# Altium PCB NRF51822_Test.PcbDoc
Units mil, origin at the board's own origin, x right, y up, seen from the top; angles counter-clockwise.
Board outline 900 x 1500 mil, 2 copper layers (Top Layer, Bottom Layer); 27 components, 43 nets, 129 pads, 8 vias.
Unrouted connection lines stored in the file: 7.
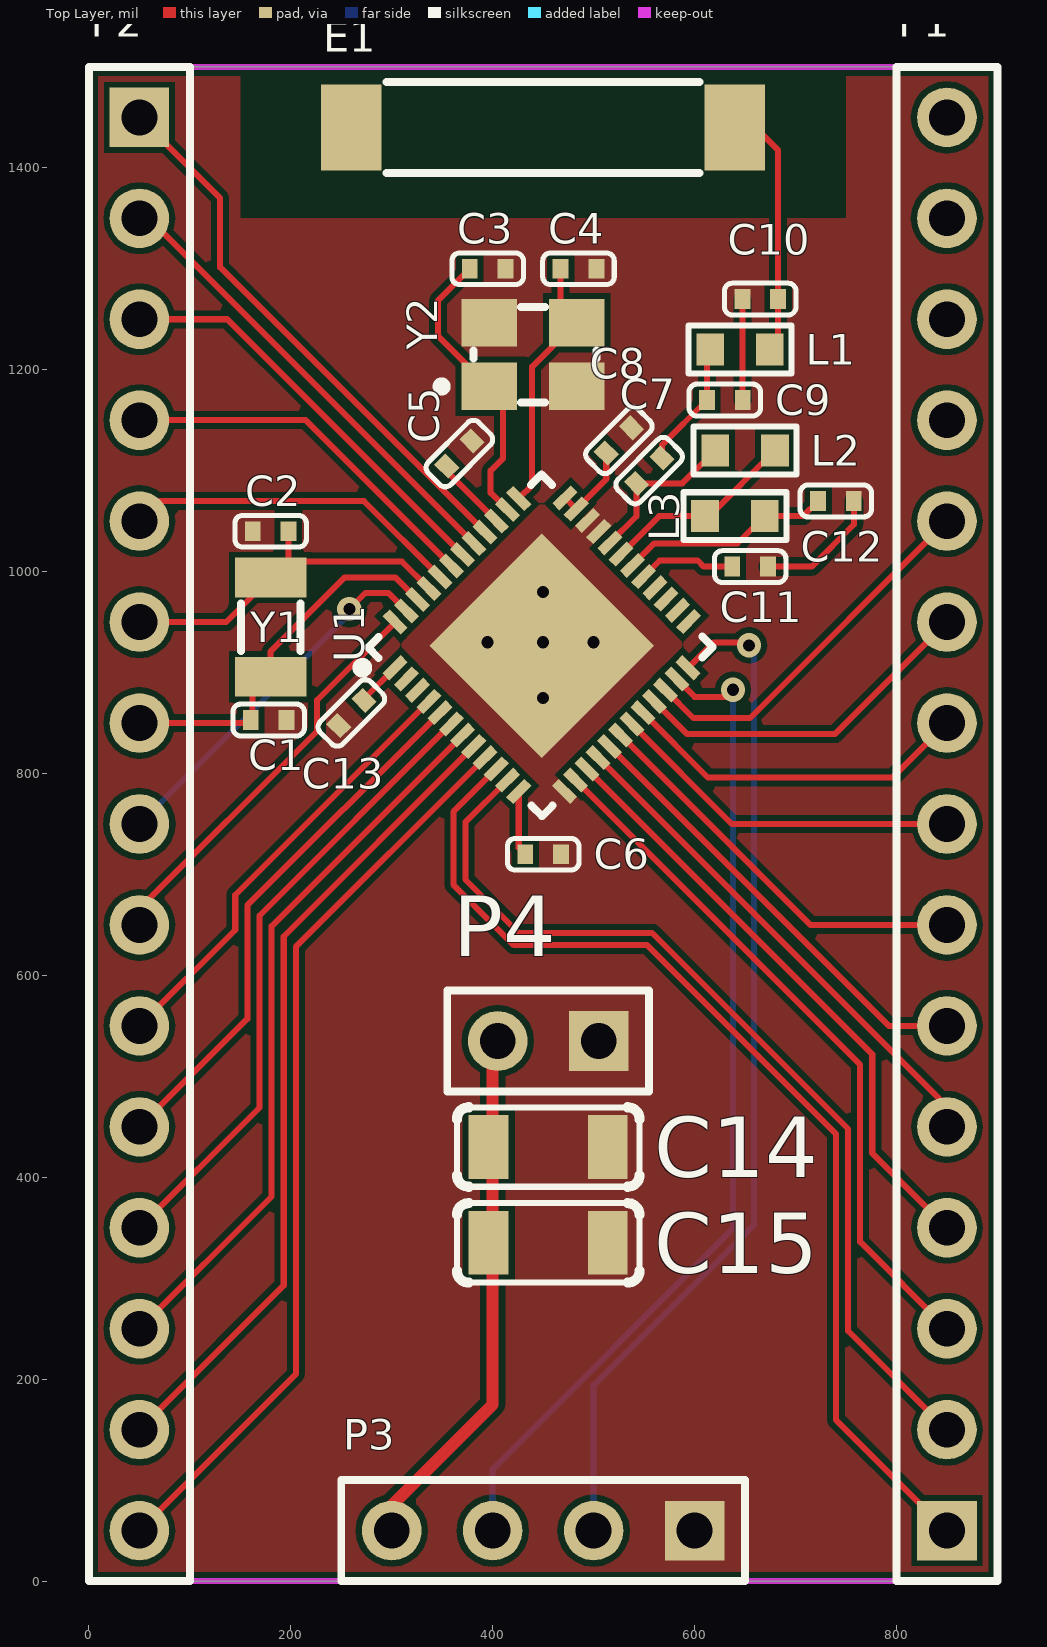
[diagram p0: Top Layer view]
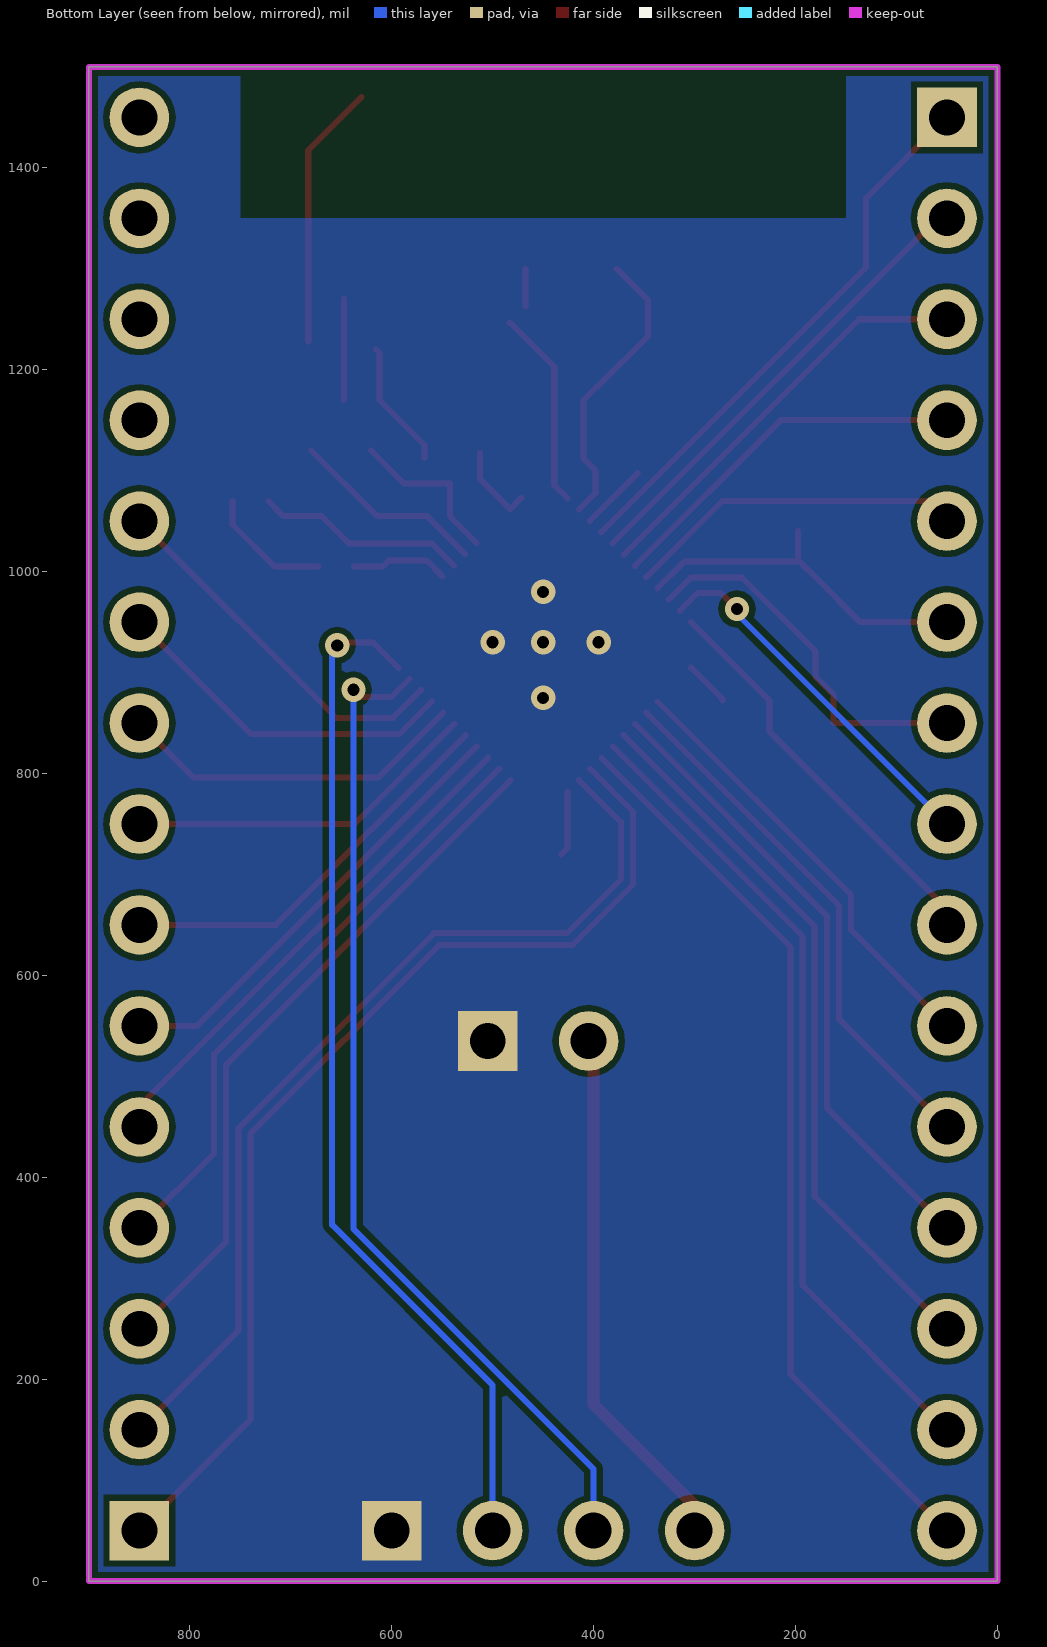
[diagram p1: Bottom Layer view, seen from below]
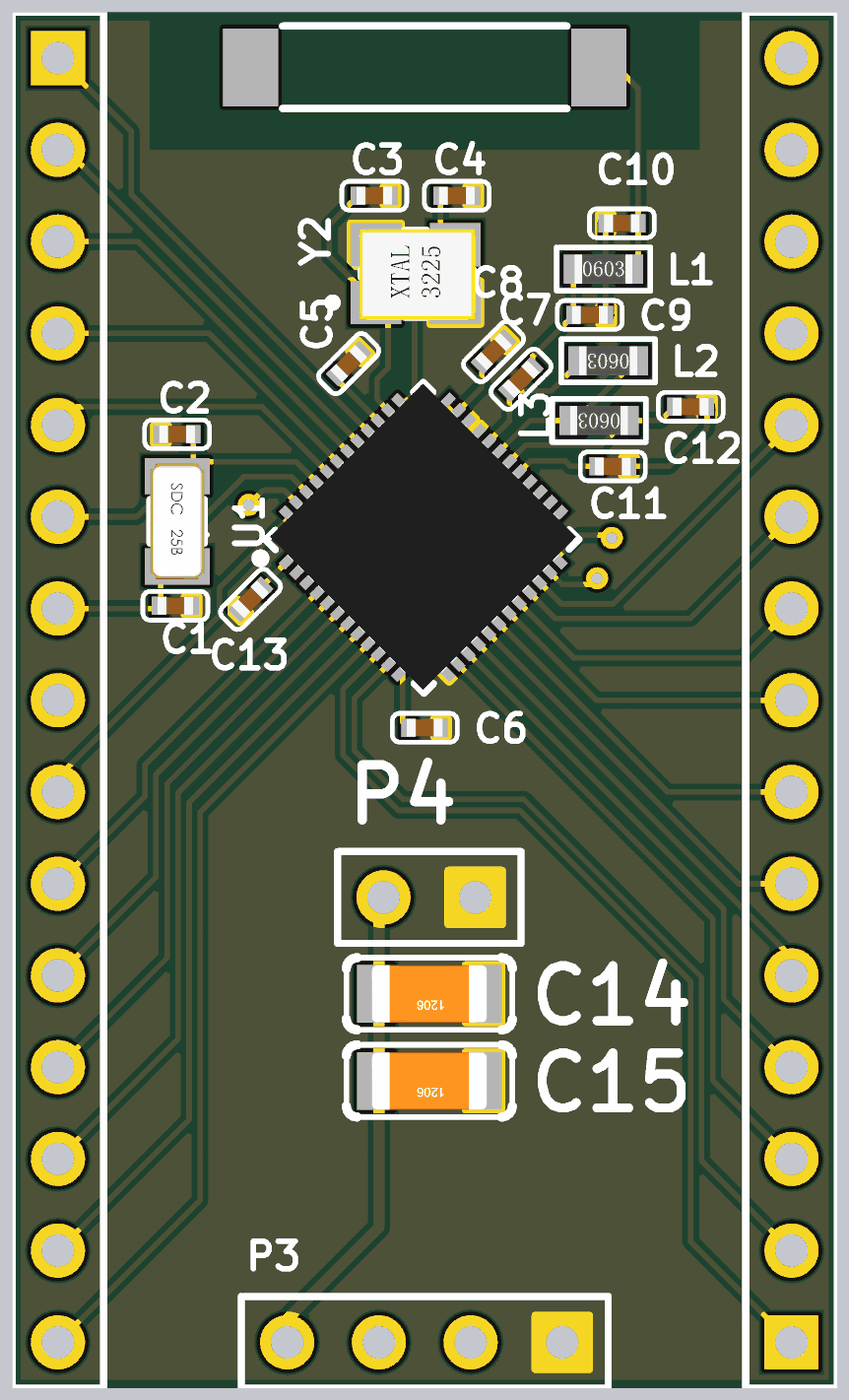
[diagram p2: 3D render of the assembled board from above, using the file's embedded part models]

## Layer stack, top to bottom
Top Solder: solder mask 0.4, Solder Resist, Dk 3.5
Top Layer: signal copper 1.4
Dielectric 1: dielectric 12.6, FR-4, Dk 4.8
Bottom Layer: signal copper 1.4
Bottom Solder: solder mask 0.4, Solder Resist, Dk 3.5

## Board outline
0,0 900,0 900,1500 0,1500

## Design rules (kind name [scope] priority, off if disabled: settings)
Clearance [All] p1: gap=6
ComponentClearance [All] p1 off: gap=10 collisioncheckmode=3 verticalgap=10 showdistances=FALSE
HoleSize [All] p1 off: absolutevalues=TRUE maxlimit=100 minlimit=1 maxpercent=80.000 minpercent=20.000
HoleToHoleClearance [All] p1 off: gap=10 allowstackedmicrovias=TRUE
LayerPairs [All] p1 off: enforce=TRUE
MinimumSolderMaskSliver [All] p1 off: minsoldermaskwidth=10
NetAntennae [All] p1 off: netantennaetolerance=0
PlaneConnect [All] p1: planeconnectstyle=Direct reliefexpansion=20 reliefentries=4 reliefconductorwidth=10 reliefairgap=10
PolygonConnect [All] p1: connectstyle=Direct reliefconductorwidth=10 reliefentries=4 polygonreliefangle="90 Angle" airgapwidth=10
RoutingVias [All] p1: holewidth=12 width=24 viastyle="Through Hole" minholewidth=12 minwidth=24 maxholewidth=12 maxwidth=24
SilkToSilkClearance [All] p1 off: silktosilkclearance=10
SilkToSolderMaskClearance [IsPad] p1 off: minsilkscreentomaskgap=10 clearancetoexposedcopper=TRUE
SolderMaskExpansion [All] p1: expansion=4
Width [All] p1: maxlimit=200 minlimit=6 preferedwidth=6
21 further rules are at their usual default settings.

## Components (designator, comment, footprint, x,y, rotation, side; value= is the part's Value field where it differs from the comment)
C1 "104" 电容_C0402 178,853 r0 top
C2 "104" 电容_C0402 180,1040 r180 top
C3 "104" 电容_C0402 395,1300 r0 top
C4 "104" 电容_C0402 485,1300 r0 top
C5 "104" 电容_C0402 367,1117 r225 top
C6 "104" 电容_C0402 450,720 r180 top
C7 "104" 电容_C0402 555,1100 r225 top
C8 "104" 电容_C0402 525,1130 r225 top
C9 "104" 电容_C0402 630,1170 r0 top
C10 "104" 电容_C0402 665,1270 r180 top
C11 "104" 电容_C0402 655,1005 r180 top
C12 "104" 电容_C0402 740,1070 r180 top
C13 "104" 电容_C0402 260,860 r45 top
C14 "104" 电容_C1206 455,430 r180 top
C15 "104" 电容_C1206 455,335 r180 top
E1 "Antenna" AN9520 450,1440 r90 top
L1 "3.3nH" 变压器电感_L0603 645,1220 r0 top
L2 "4.7nH" 变压器电感_L0603 650,1120 r180 top
L3 "10nH" 变压器电感_L0603 640,1055 r180 top
L4 "LOGO" "LOGO L BS" 1390,560 r90 top
P1 "Header 15" HDR1X15 850,50 r90 top
P2 "Header 15" HDR1X15 50,1450 r270 top
P3 "Header 4" HDR1X4 600,50 r180 top
P4 "Header 2" HDR1X2 505,535 r180 top
U1 "nRF51822-QFAA" "QFN48 6X6" 450,925 r45 top
Y1 "32.768kHz" 晶振_3215 180,945 r270 top
Y2 "16MHz" 晶振_3225 440,1215 r0 top

## Footprints (in the part's own frame and the unit in brackets; to place one, negate y for a bottom-side part, rotate by r counter-clockwise, add the part's x,y. Pads: shape width x height; smd on the part's side, far side on the other; paste and mask are expansions set on the pad)
AN9520 [mil] "Multilayer Chip Antenna for  2.4GHz Wireless Communication"
  rect 85x60 smd: 1(0,-190) 2(0,190)
  silkscreen extent -45,-155 45,155, body extent -40,-180 40,180, height 39
HDR1X2 [mm] "Connector; Header; 2 Position"
  rect 1.5x1.5 hole 0.9: 1(0,0)
  round 1.5 hole 0.9: 2(2.54,0)
  silkscreen extent -1.27,-1.27 3.81,1.27
HDR1X4 [mm] "Connector; Header; 4 Position"
  rect 1.5x1.5 hole 0.9: 1(0,0)
  round 1.5 hole 0.9: 2(2.54,0) 3(5.08,0) 4(7.62,0)
  silkscreen extent -1.27,-1.27 8.89,1.27
HDR1X15 [mm] "Connector; Header; 15 Position"
  rect 1.5x1.5 hole 0.9: 1(0,0)
  round 1.5 hole 0.9: 2(2.54,0) 3(5.08,0) 4(7.62,0) 5(10.16,0) 6(12.7,0) 7(15.24,0) 8(17.78,0) 9(20.32,0) 10(22.86,0) 11(25.4,0) 12(27.94,0) 13(30.48,0) 14(33.02,0) 15(35.56,0)
  silkscreen extent -1.27,-1.27 36.83,1.27
"LOGO L BS" [mil]
"QFN48 6X6" [mm] "QFN, 48-Leads, Body 7.00x7.00mm, Pitch 0.50mm, Thermal Pad 5.73x5.73mm, IPC Medium Density"
  rect 0.65x0.25 smd: 1(-2.997,2.271) 2(-2.997,1.871) 3(-2.997,1.471) 4(-2.997,1.071) 5(-2.997,0.671) 6(-2.997,0.271) 7(-2.997,-0.129) 8(-2.997,-0.529) 9(-2.997,-0.929) 10(-2.997,-1.329) 11(-2.997,-1.729) 12(-2.997,-2.129) 25(3.048,-2.129) 26(3.048,-1.729) 27(3.048,-1.329) 28(3.048,-0.929) 29(3.048,-0.529) 30(3.048,-0.129) 31(3.048,0.271) 32(3.048,0.671) 33(3.048,1.071) 34(3.048,1.471) 35(3.048,1.871) 36(3.048,2.271)
  rect 0.25x0.65 smd: 13(-2.184,-2.941) 14(-1.784,-2.941) 15(-1.384,-2.941) 16(-0.984,-2.941) 17(-0.584,-2.941) 18(-0.184,-2.941) 19(0.216,-2.941) 20(0.616,-2.941) 21(1.016,-2.941) 22(1.416,-2.941) 23(1.816,-2.941) 24(2.216,-2.941) 37(2.216,3.083) 38(1.816,3.083) 39(1.416,3.083) 40(1.016,3.083) 41(0.616,3.083) 42(0.216,3.083) 43(-0.184,3.083) 44(-0.584,3.083) 45(-0.984,3.083) 46(-1.384,3.083) 47(-1.784,3.083) 48(-2.184,3.083)
  rect 4x4 smd: 49(0,0.055)
  silkscreen extent -3.71,-3.01 3.05,3.11, body extent -2.99,-2.93 3.05,3.11, height 0.85
变压器电感_L0603 [mm]
  rect 0.7x0.8 smd: 1(-0.75,0) 2(0.75,0)
  silkscreen extent -1.3,-0.6 1.3,0.6, body extent -0.8,-0.4 0.8,0.4, height 0.45
晶振_3215 [mm] "XTAL SMD 3.2 x 1.5 mm"
  rect 1x1.8 smd: 1(-1.25,0) 2(1.25,0)
  silkscreen extent -0.6,-0.75 0.6,0.75, body extent -1.6,-0.75 1.6,0.75, height 0.81
晶振_3225 [mm]
  rect 1.4x1.2 smd: 0(-1.1,0.8) 0(1.1,-0.8) 1(-1.1,-0.8) 2(1.1,0.8)
  silkscreen extent -2.4,-1.2 1.6,1.2, body extent -1.55,-1.27 1.65,1.23, height 0.8
电容_C0402 [mm]
  rect 0.4x0.5 smd: 1(-0.45,0) 2(0.45,0)
  silkscreen extent -0.9,-0.4 0.9,0.4, body extent -0.5,-0.25 0.5,0.25, height 0.5
电容_C1206 [mm]
  rect 1x1.6 smd: 1(-1.5,0) 2(1.5,0)
  silkscreen extent -2.3,-1 2.3,1, body extent -1.6,-0.8 1.6,0.8, height 1

## Part data
C1 C2 C3 C4 C5 C6 C7 C8 C9 C10 C11 C12 C13 C14 C15: library part Cap
E1: "Generic Antenna"
L1 L2 L3: library part "Inductor Iron"
L4: library part LOGO_TRIGGER
P1 P2: "Header, 15-Pin"
P3: "Header, 4-Pin"
P4: "Header, 2-Pin"
U1: "QFN48"
Y1: library part XTAL_A
Y2: library part XTAL_B

## Via types
v1: diameter 24, hole 12, Top Layer to Bottom Layer, 8 vias

## Nets (pads, with @x,y where several pads share a name; then routed paths per layer and width w, separated by ;. In a path a pad name is that pad's centre, name@x,y a point inside that pad or via, vN(x,y) a via of type N, cw(c..) or ccw(c..) an arc to the next point about the centre after c; other vN are vias at no path point)
GND: C1.2 C2.2 C3.2 C4.2 C5.1 C6.1 C8.1 C9.2 C10.2 C11.1 C12.1 C13.1 C14.1 C15.1 P3.1 P4.1 U1.13 U1.33 U1.34 U1.49 Y2.0 | length 225.7
  Top Layer w6: C10.2 647.28,1170.43 C9.2 ; C11.1 716,1005 757.72,1046.72 C12.1
  other v1: 450,875 395,930 450,930 500,930 450,980
NetC3_1: C3.1 U1.38 Y2.1 | length 290.5
  Top Layer w6: C3.1 346,1268.72 346,1233.28 395.78,1183.5 Y2.1 410,1170.2 410,1112 398,1100 398,1078.09 U1.38
NetC4_1: C4.1 U1.37 Y2.2 | length 235.8
  Top Layer w6: U1.37 439,1085.67 439,1203.11 482.39,1246.5 Y2.2 ; Y2.2@467.28,1262.52 C4.1
NetC5_2: C5.2 U1.39 | length 66.8
  Top Layer w6: C5.2@356.34,1097.47 U1.39
NetC7_1: C7.1 C9.1 L1.1 | length 127.3
  Top Layer w6: C7.1 567.53,1125.24 C9.1 612.28,1216.81 L1.1
NetC7_2: C7.2 L2.2 U1.32 | length 161.3
  Top Layer w6: U1.32 542.47,1054.85 C7.2 587.94,1087.47 L2.2
NetC10_1: C10.1 E1.1 L1.2 | length 263.6
  Top Layer w6: E1.1@630,1470 682.72,1417.28 C10.1 L1.2@682.72,1228.19
NetC11_2: C11.2 U1.29 | length 96.8
  Top Layer w6: U1.29 565.44,1011 603,1011 609,1005 C11.2
NetC12_2: C12.2 L3.1 U1.30 | length 210.2
  Top Layer w6: U1.30 560.17,1028 642.53,1028 L3.1 707.28,1055 C12.2
NetL2_1: L2.1 L3.2 U1.31 | length 194.7
  Top Layer w6: U1.31 564.89,1055 L3.2 614.53,1055 L2.1
P0.00: P2.10 U1.4 | length 440.2
  Top Layer w6: P2.10 145,645 145,679.65 U1.4
P0.01: P2.11 U1.5 | length 533.6
  Top Layer w6: P2.11 157,557 157,669.38 U1.5
P0.02: P2.12 U1.6 | length 627.1
  Top Layer w6: P2.12 169,469 169,659.11 U1.6
P0.03: P2.13 U1.7 | length 720.6
  Top Layer w6: P2.13 181,381 181,648.83 U1.7
P0.04: P2.14 U1.8 | length 814.1
  Top Layer w6: P2.14 193,293 193,638.56 U1.8
P0.05: P2.15 U1.9 | length 907.5
  Top Layer w6: P2.15 205,205 205,628.29 U1.9
P0.06: P1.1 U1.10 | length 1052.1
  Top Layer w6: U1.10 361,762.02 361,690 421,630 553,630 740,443 740,160 P1.1
P0.07: P1.2 U1.11 | length 935.6
  Top Layer w6: U1.11 373,751.75 373,695 426,642 558,642 752,448 752,248 P1.2
P0.08: P1.3 U1.14 | length 695.8
  Top Layer w6: U1.14 764,511.65 764,336 P1.3
P0.09: P1.4 U1.15 | length 602.3
  Top Layer w6: U1.15 776,521.92 776,424 P1.4
P0.10: P1.5 U1.16 | length 508.9
  Top Layer w6: U1.16 850,470.19 P1.5
P0.11: P1.6 U1.17 | length 449.1
  Top Layer w6: U1.17 792.46,550 P1.6
P0.12: P1.7 U1.18 | length 401.1
  Top Layer w6: U1.18 714.73,650 P1.7
P0.13: P1.8 U1.19 | length 353.2
  Top Layer w6: U1.19 637,750 P1.8
P0.14: P1.9 U1.20 | length 350
  Top Layer w6: U1.20 613.27,796 796,796 P1.9
P0.15: P1.10 U1.21 | length 349.3
  Top Layer w6: U1.21 592.55,839 739,839 P1.10
P0.16: P1.11 U1.22 | length 370.9
  Top Layer w6: U1.22 598.82,855 655,855 P1.11
P0.17: P1.12 U1.25
P0.18: P1.13 U1.26
P0.19: P1.14 U1.27
P0.20: P1.15 U1.28
P0.21: P2.1 U1.40 | length 552.7
  Top Layer w6: P2.1 130,1370 130,1301.55 U1.40
P0.22: P2.2 U1.41 | length 464.7
  Top Layer w6: P2.2 59.27,1350 U1.41
P0.23: P2.3 U1.42 | length 416.7
  Top Layer w6: P2.3 137,1250 U1.42
P0.24: P2.4 U1.43 | length 368.8
  Top Layer w6: P2.4 214.73,1150 U1.43
P0.25: P2.5 U1.44 | length 337.4
  Top Layer w6: P2.5 70,1070 272.46,1070 U1.44
P0.26: C2.1 P2.6 U1.45 Y1.1 | length 375.7
  Top Layer w6: P2.6 135.79,950 Y1.1 ; C2.1 197.72,1011.93 Y1.1 ; U1.45 310.19,1010 195.79,1010 Y1.1
P0.27: C1.1 P2.7 U1.46 Y1.2 | length 375.5
  Top Layer w6: P2.7 162.28,850 162.28,878.07 Y1.2 180,921 253,994 303.92,994 U1.46
P0.28: P2.8 U1.47 | length 369.7
  Top Layer w6: v1(258,963) 274,979 296.65,979 U1.47
  Bottom Layer w6: P2.8 258,958 v1(258,963)
P0.29: P2.9 U1.48 | length 405
  Top Layer w6: P2.9 50,666 225.94,841.95 225.94,872.62 U1.48
SWCLK: P3.2 U1.24 | length 1017.1
  Top Layer w6: U1.24 618.74,930 651,930 v1(654,927)
  Bottom Layer w6: P3.2 500,194 659,353 659,922 v1(654,927)
SWDIO: P3.3 U1.23 | length 997.4
  Top Layer w6: U1.23 600.09,876 631,876 v1(638,883)
  Bottom Layer w6: P3.3 400,110.97 638,348.97 v1(638,883)
VCC: C6.2 C8.2 C13.2 C14.2 C15.2 P3.4 P4.2 U1.1 U1.12 U1.35 U1.36 | length 708.3
  Top Layer w6: C13.2 272.53,873.99 U1.1 ; U1.12 425.82,726.46 C6.2 ; U1.36 U1.35 512.47,1091.66 C8.2
  Top Layer w12: P3.4@295,70 400,175 400,520 P4.2@385,535
pads on no net: E1.2 U1.2 U1.3

## Polygon pours and split planes (outlines as drawn)
GND on Top Layer "DGND" (solid, pour order 0): 0,1500 150,1500 150,1350 750,1350 750,1500 900,1500 900,0 0,0
GND on Bottom Layer "DGND" (solid, pour order 2): 0,1500 150,1500 150,1350 750,1350 750,1500 900,1500 900,0 0,0

## Keep-outs
Keep-Out Layer:
  the board outline again, w6

## Silkscreen, mask and mechanical layers (free items; w line width, h text height)
Mechanical 1:
  the board outline again, w6